# Altium PCB 400902.PcbDoc (part 1 of 2)
Units mm, origin at the board's own origin, x right, y up, seen from the top; angles counter-clockwise.
Board outline 45.72 x 50.8 mm, 4 copper layers (Top Layer, Mid-Layer 1, Mid-Layer 2, Bottom Layer), stack 1.564 mm thick; 61 components, 50 nets, 204 pads, 509 vias.
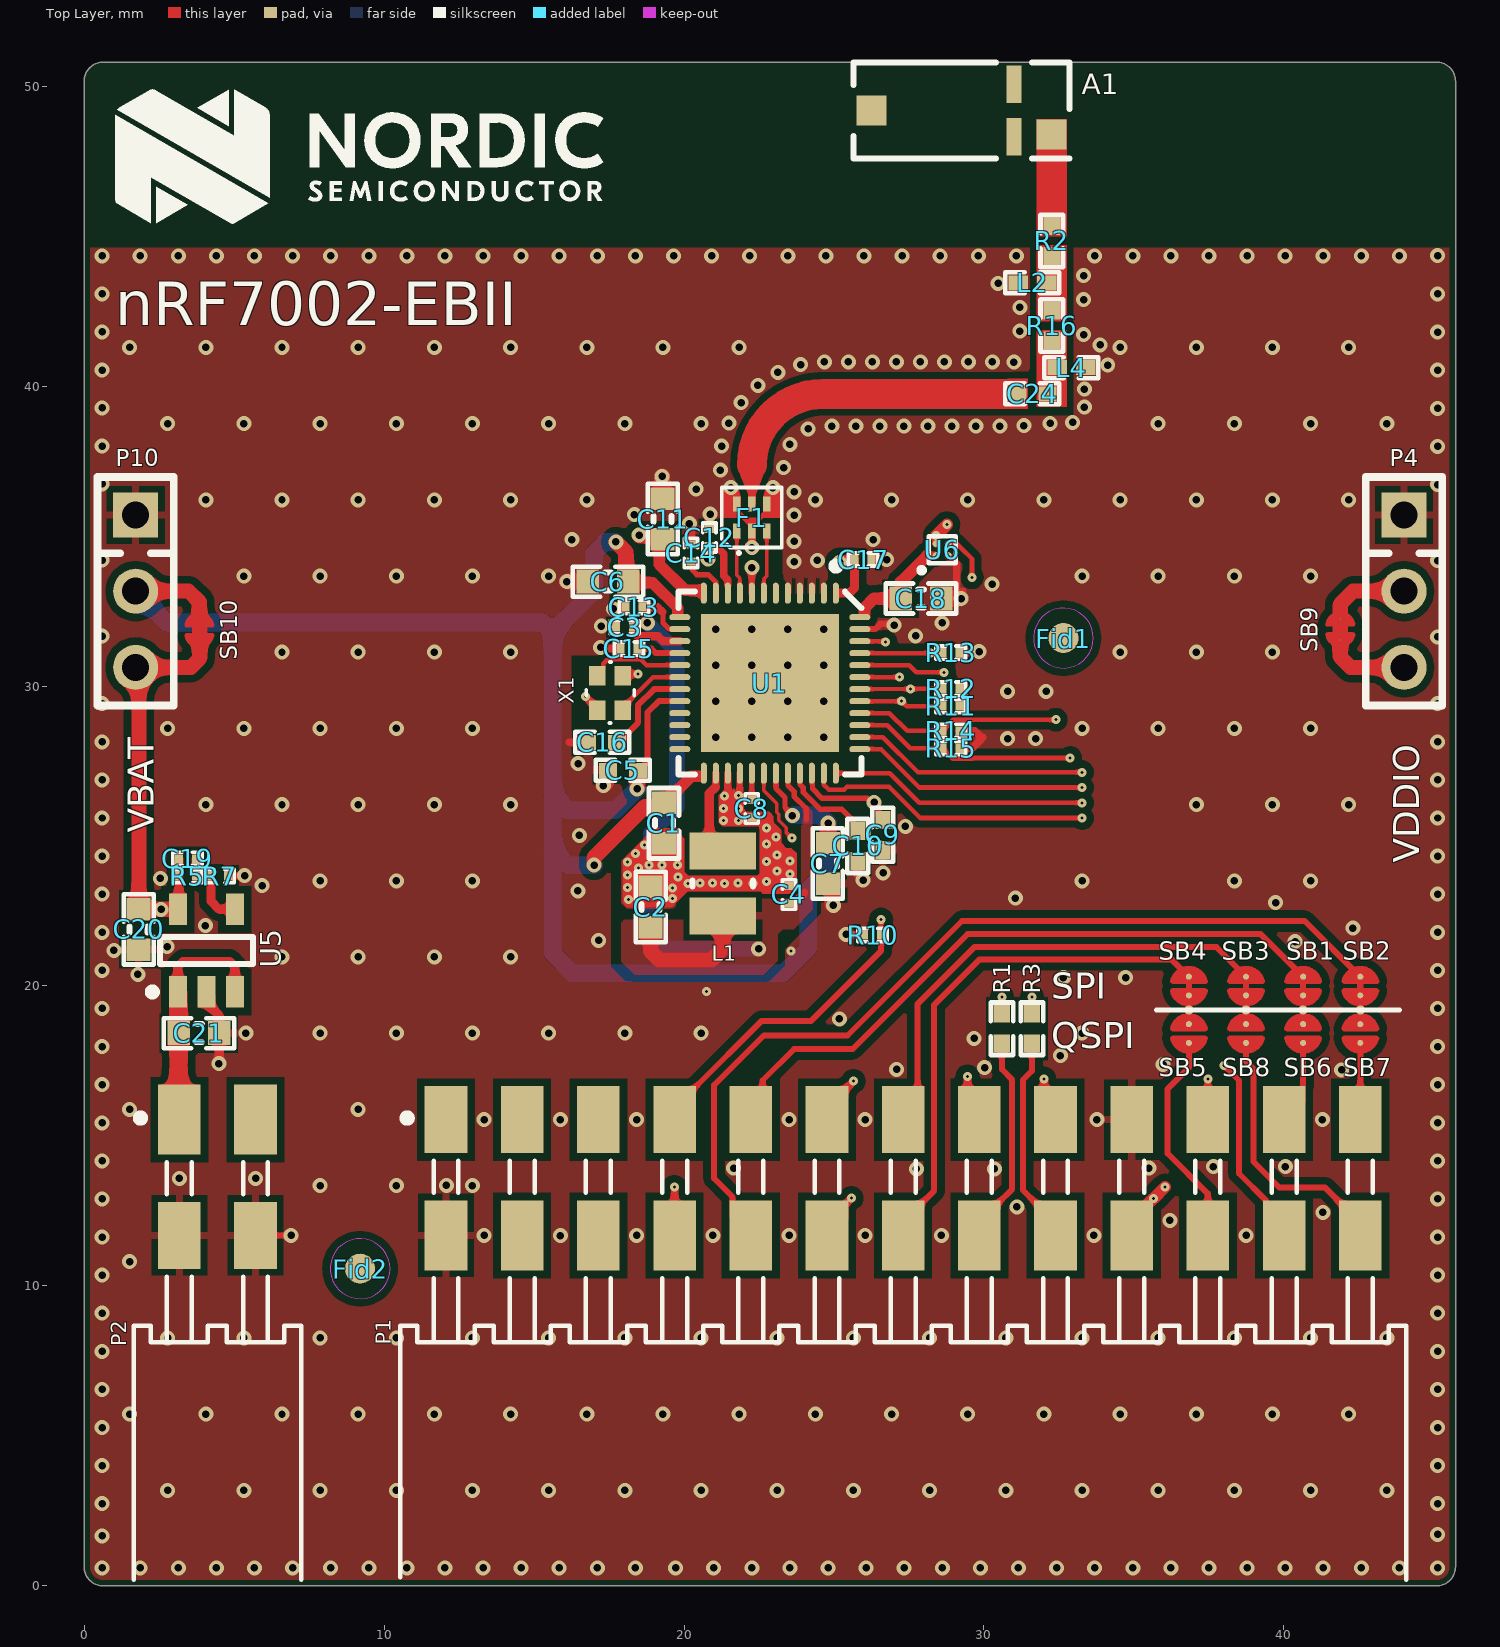
[diagram p0: Top Layer view]
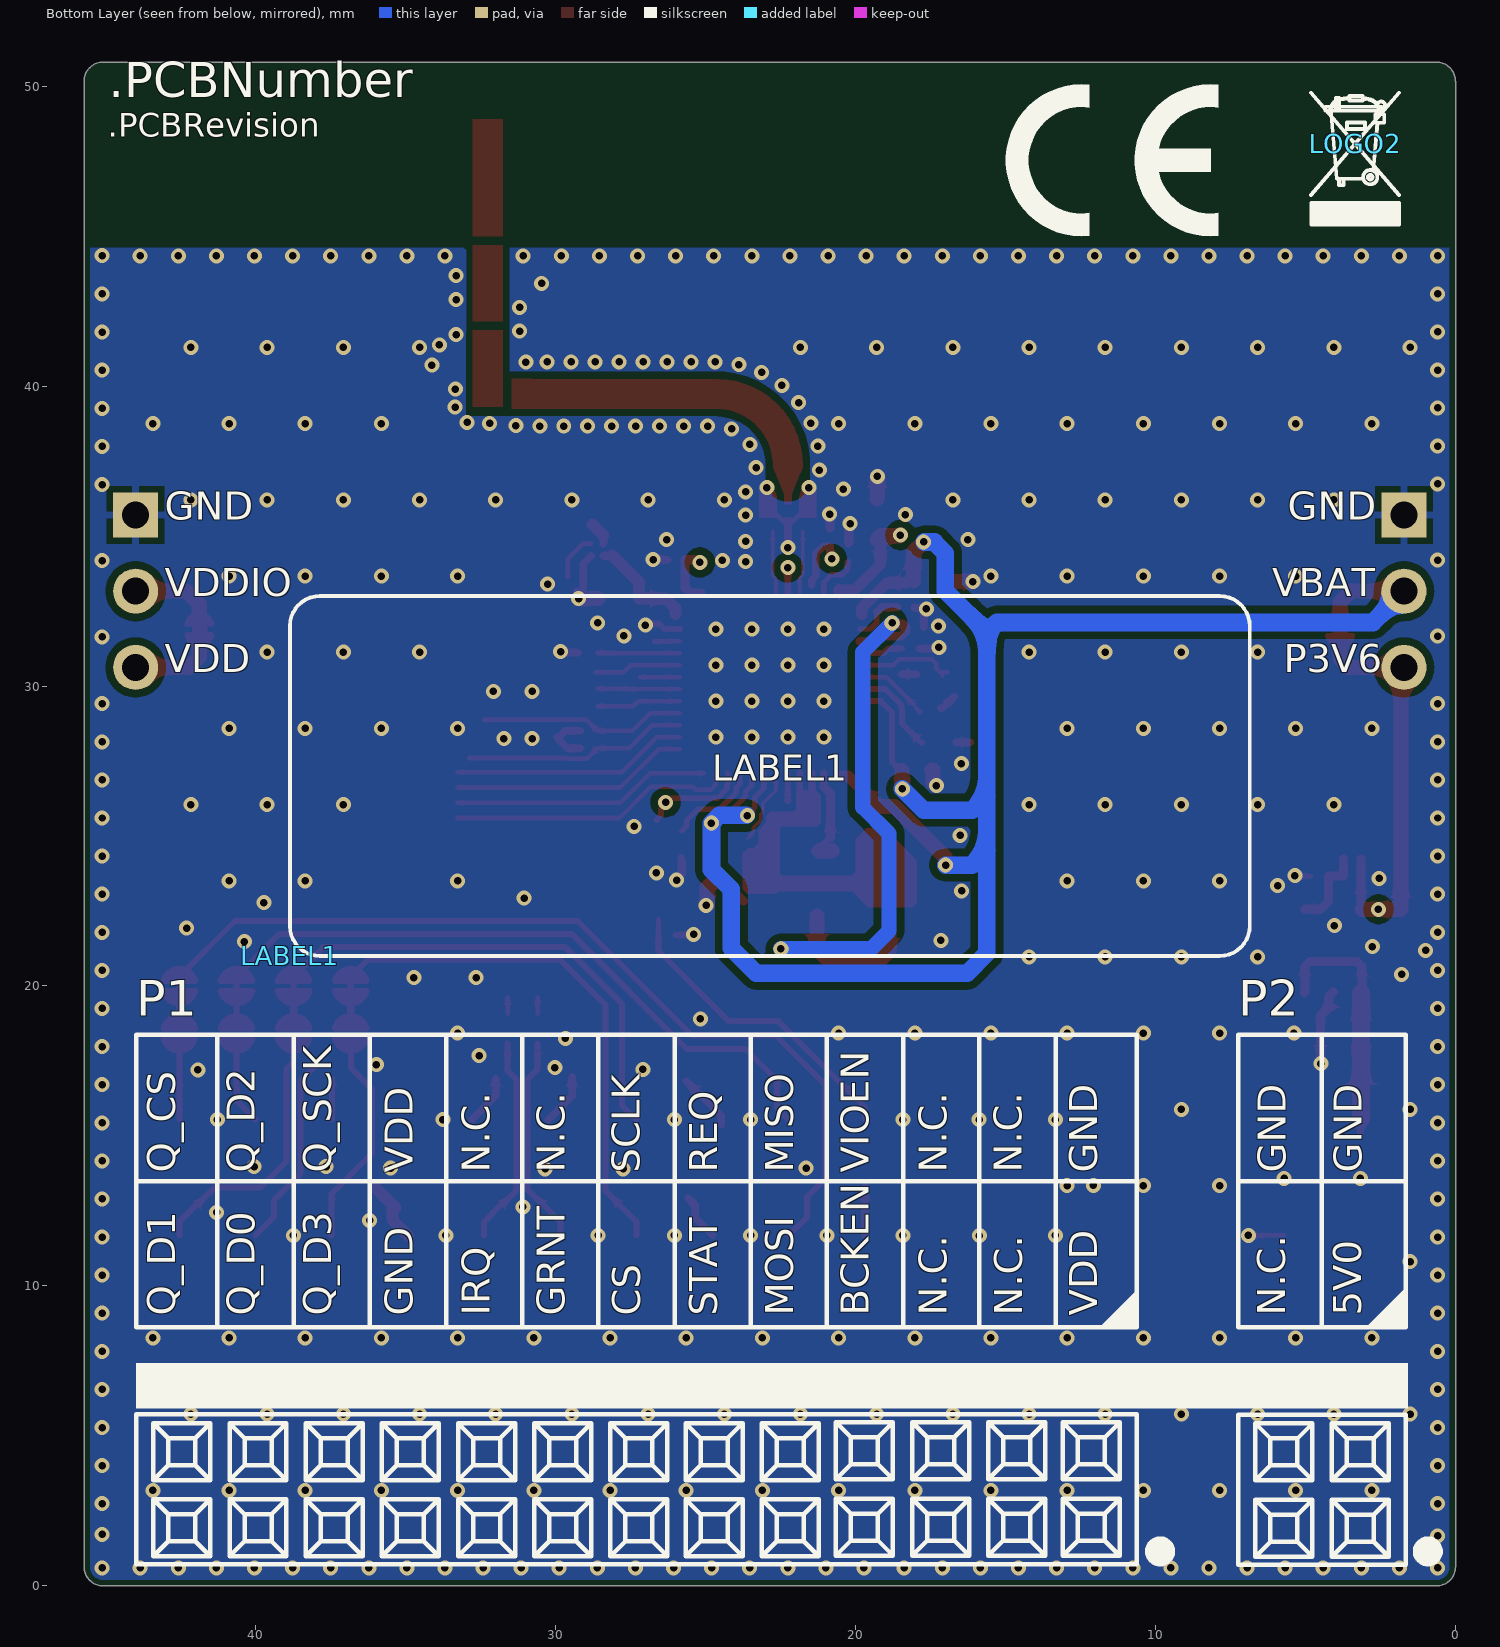
[diagram p1: Bottom Layer view, seen from below]
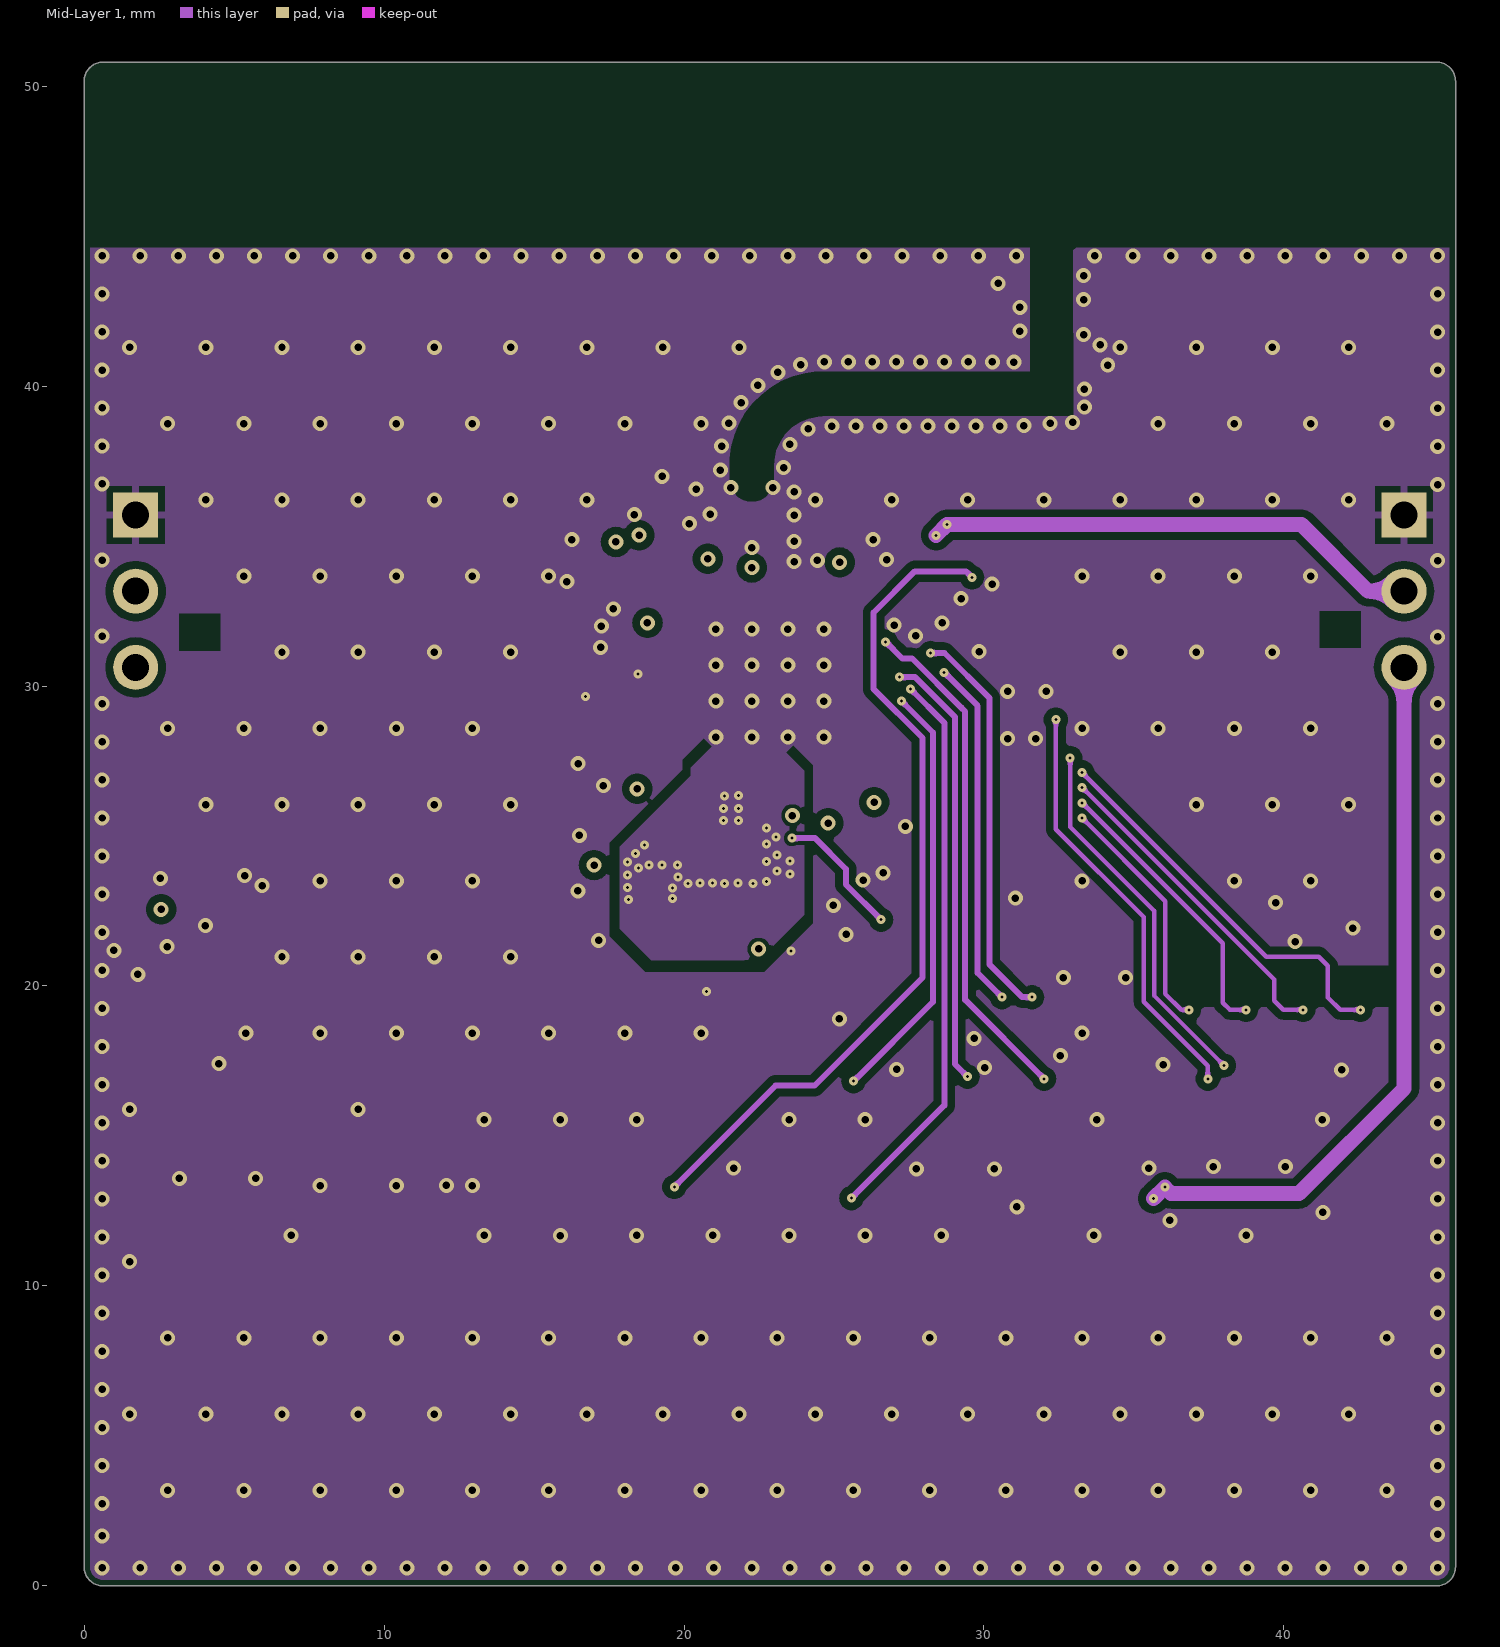
[diagram p2: Mid-Layer 1]
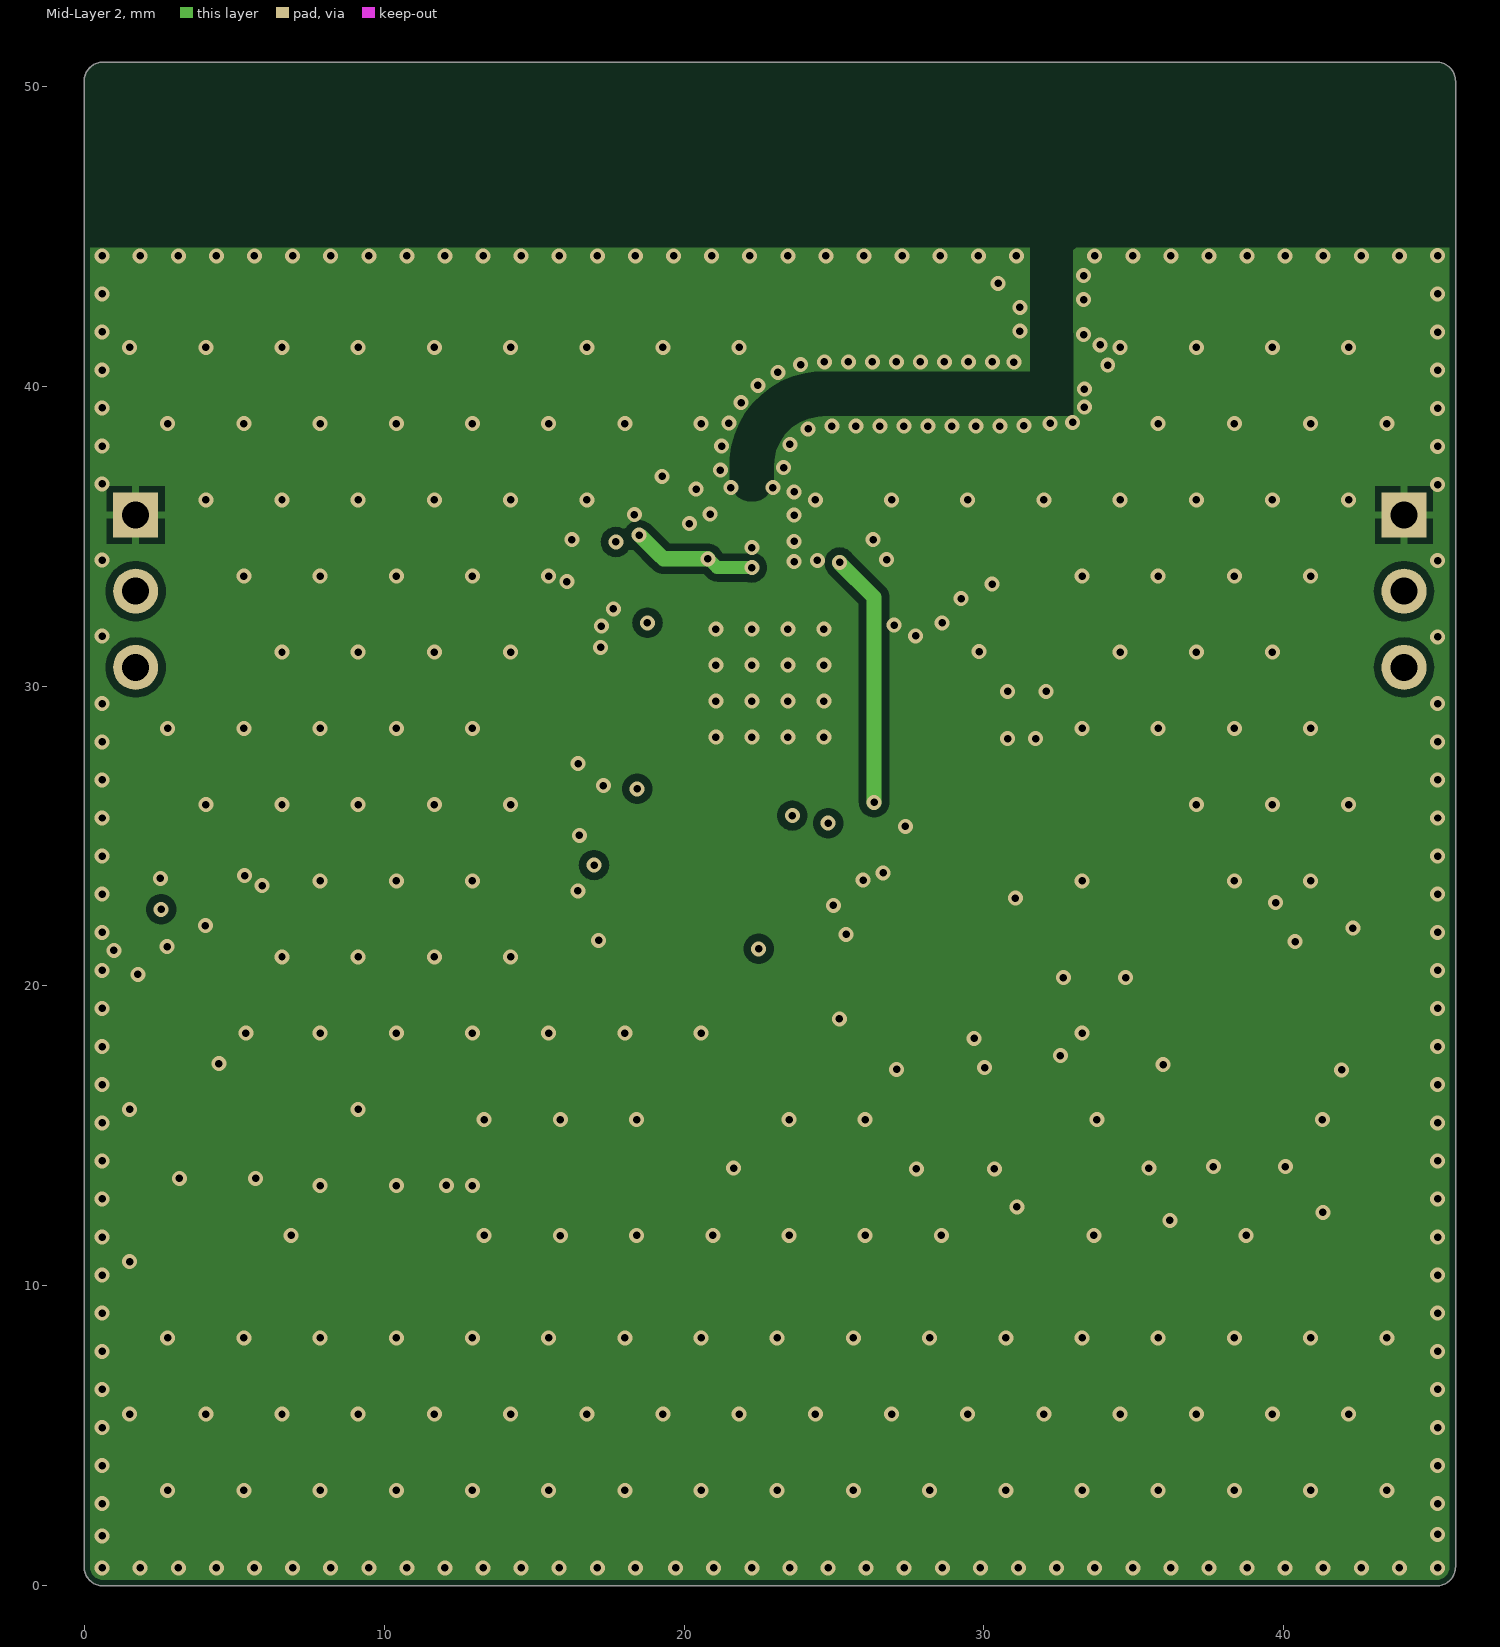
[diagram p3: Mid-Layer 2]
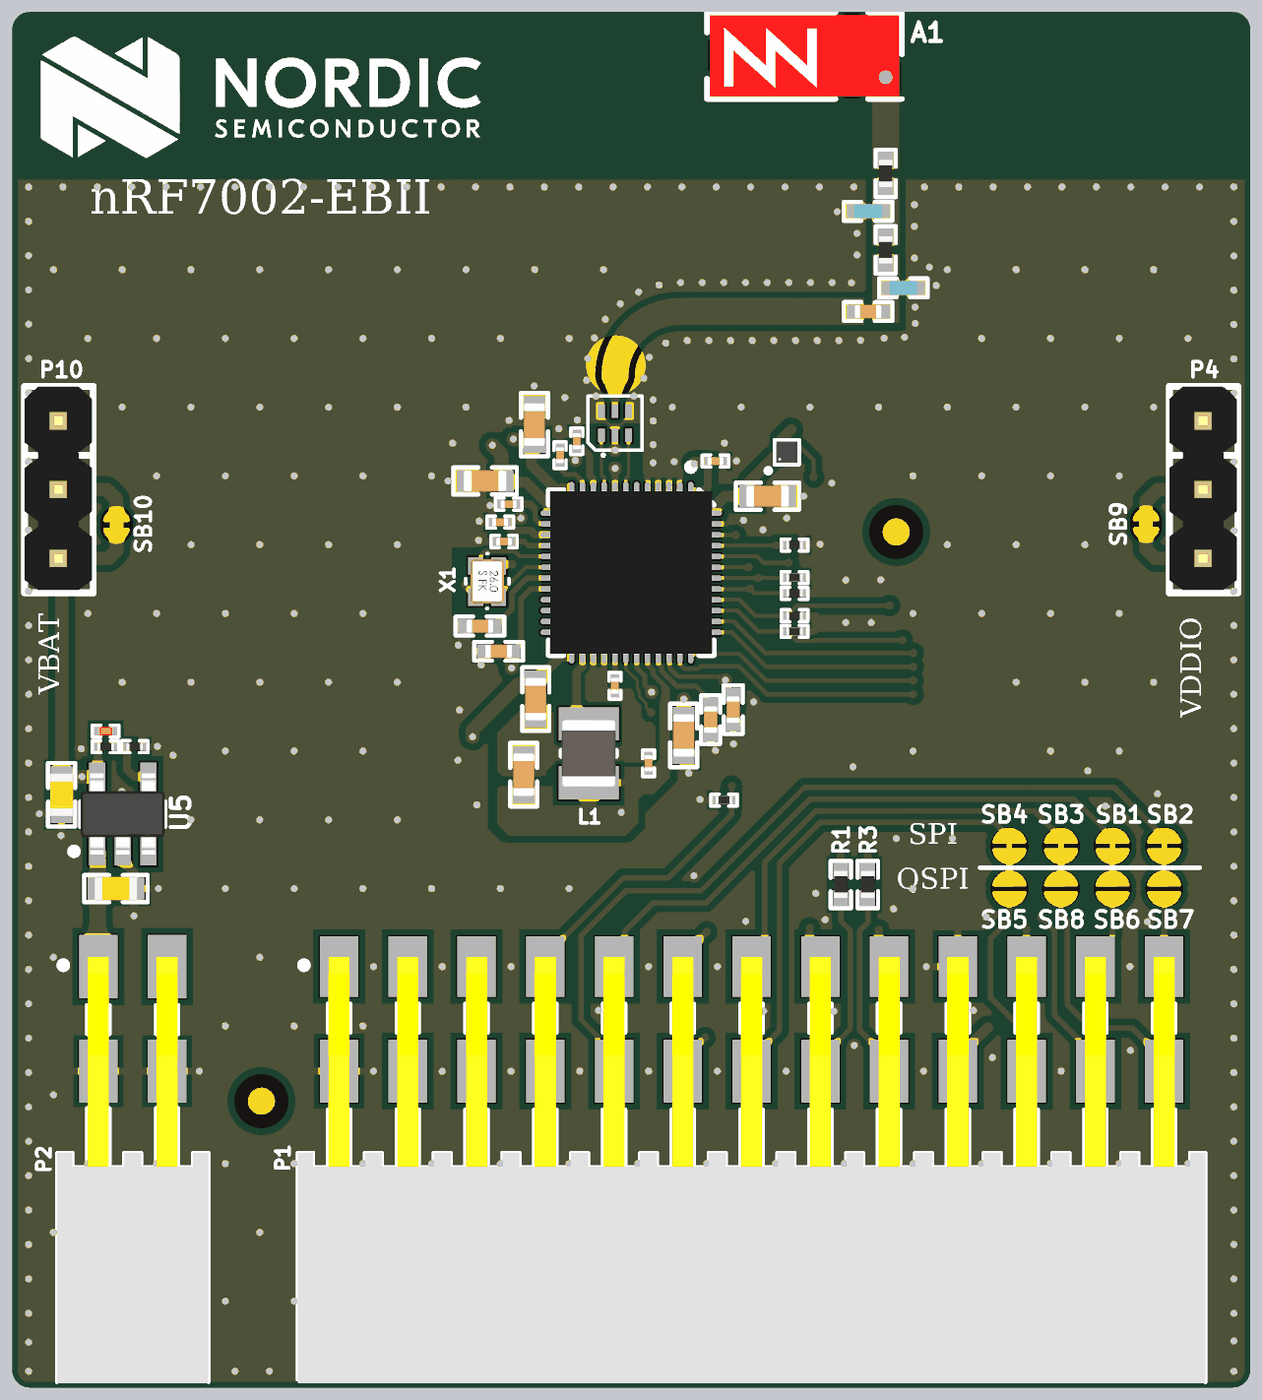
[diagram p5: 3D render of the assembled board from above, using the file's embedded part models]

## Layer stack, top to bottom
Top Solder: solder mask 0.0254, Solder Resist Blue, Dk 4
Top Layer: signal copper 0.0356
Dielectric1: prepreg 0.076, FR-4, Dk 4.4
Mid-Layer 1: signal copper 0.0356
Dielectric2: core 1.27, FR-4, Dk 4.4
Mid-Layer 2: signal copper 0.0356
Dielectric3: prepreg 0.076, FR-4, Dk 4.4
Bottom Layer: signal copper 0.0356
Bottom Solder: solder mask 0.0254, Solder Resist Blue, Dk 4

## Board outline
0,0.635 ccw(c0.635,0.635) 0.635,0 45.085,0 ccw(c45.085,0.635) 45.72,0.635 45.72,50.164 ccw(c45.085,50.164) 45.085,50.799 45.085,50.8 0.636,50.8 0.636,50.799 ccw(c0.636,50.164) 0.001,50.164 0,50.164

## Design rules (kind name [scope] priority, off if disabled: settings)
BoardOutlineClearance [Not (InComponent('A1') or InComponent('P1')or InComponent('P2') or HasPad('Free-666'))] p1: gap=0.2 ignorepadtopadclearanceinfootprint=FALSE
Clearance RF_Clerance [InNetClass('RF') vs InPoly] p1: gap=0.23 ignorepadtopadclearanceinfootprint=FALSE
Clearance Polygon_Clearance [(InNamedPolygon('Top_Layer-GND')) or (InNamedPolygon('Bottom_Layer-GND')) or (InNamedPolygon('Mid_Layer_1-GND')) or (InNamedPolygon('Mid_Layer_2-GND'))] p2: gap=0.25 ignorepadtopadclearanceinfootprint=FALSE
Clearance U1_Clearance [TouchesRoom('nRF7002_room') vs OnTopLayer] p3: gap=0.12 ignorepadtopadclearanceinfootprint=FALSE
Clearance [All] p4: gap=0.125 ignorepadtopadclearanceinfootprint=FALSE
DiffPairsRouting [All] p1: maxlimit=0.254 minlimit=0.15 mostfreqgap=0.254 toplayer_maxgap=0.15 toplayer_prefgap=0.15 toplayer_minwidth=0.203 toplayer_maxwidth=0.381 toplayer_prefwidth=0.381 midlayer1_mingap=0.254 midlayer1_minwidth=0.203 midlayer1_maxwidth=0.381 midlayer1_prefwidth=0.381 midlayer2_mingap=0.254 midlayer2_minwidth=0.203 midlayer2_maxwidth=0.381 midlayer2_prefwidth=0.381 bottomlayer_maxgap=0.15 bottomlayer_prefgap=0.15 bottomlayer_minwidth=0.203 bottomlayer_maxwidth=0.381 bottomlayer_prefwidth=0.381 maxuncoupledlength=12.7
FabricationTestPointUsage TestPointUsage [All] p1: valid=0 allowmultiple=FALSE
FabricationTestpoint Testpoint [All] p1: side=3 testpointundercomponent=TRUE minsize=1.016 maxsize=2.54 preferedsize=1.524 minholesize=0 maxholesize=1.016 preferedholesize=0.813 testpointgrid=0.025 allowsidetop=TRUE allowsidebottom=TRUE usegrid=TRUE gridtolerance=0
Height [All] p1 off: minheight=0 maxheight=25.4 prefheight=12.7
HoleSize [All] p1: absolutevalues=TRUE maxlimit=5 minlimit=0.1 maxpercent=80.000 minpercent=20.000
HoleToHoleClearance [All] p1: gap=0.25 allowstackedmicrovias=FALSE
MinimumAnnularRing [All] p1: minimumring=0.1
MinimumSolderMaskSliver [Not InComponent('U1')] p1: minsoldermaskwidth=0.075
PolygonConnect PolygonConnect_Via [isVia and innet(gnd)] p1: connectstyle=Direct reliefconductorwidth=0.254 reliefentries=4 polygonreliefangle="90 Angle" airgapwidth=0.254
PolygonConnect PolygonConnect_footprint [HasFootprint('INDC1005X04L_C2') or  HasFootprint('CAPC1005X04L_C2') or  HasFootprint('RESC1005X04L_C2') or   HasFootprint('CAPC1608X06L') or  HasFootprint('CAPC2012X11L') or  HasFootprint('SOT95P280X140-5N')] p2: connectstyle=Direct reliefconductorwidth=0.254 reliefentries=4 polygonreliefangle="90 Angle" airgapwidth=0.254
PolygonConnect [All] p3: connectstyle=Relief reliefconductorwidth=0.254 reliefentries=4 polygonreliefangle="90 Angle" airgapwidth=0.213
RoomDefinition nRF7002_room [False vs False] p1: confinementstyle=ConfineIn formatcopy=TRUE lockcomponents=FALSE outline 15.374,37.727 29.243,37.727 29.243,25.1 15.374,25.1
RoutingVias [All] p1: holewidth=0.25 width=0.5 viastyle="Through Hole" minholewidth=0.1 minwidth=0.5 maxholewidth=0.711 maxwidth=1.27
SilkToSolderMaskClearance SilkscreenOverComponentPads [IsPad vs Not (HasFootprint('CAPC1608X06L') or HasFootprint('CAPC0603X03L_C') or HasFootprint('CAPC1005X04L') or HasFootprint('INDC1005X04L') or HasFootprint('RESC0603X03L_C') or HasFootprint('LED_0603_G') or HasFootprint('BGA4C40P2X2_76X76X62') or  HasFootprint('RESC1005X04L') or HasFootprint('INDC1005X04L_WW'))] p1: minsilkscreentomaskgap=0.1 clearancetoexposedcopper=TRUE
SolderMaskExpansion SolderMaskExpansion_via [IsVia] p1: expansion=0.076 istentingtop=TRUE
SolderMaskExpansion SolderMaskExpansion_1 [All] p2: expansion=0.076 istentingtop=FALSE
Width U1_Width [All] p1: maxlimit=2.54 minlimit=0.11 preferedwidth=0.15
Width [All] p2: maxlimit=2.54 minlimit=0.15 preferedwidth=0.15
22 further rules are at their usual default settings.

## Classes and differential pairs
net class RF: ANT ANTWIFI NetC24_1 NetL2_2 TXRF0 TXRF1

## Components (designator, comment, footprint, x,y, rotation, side; value= is the part's Value field where it differs from the comment)
A1 "NN03-320" NN03-320 29.257,49.19 r0 top locked
C1 "4.7µF" CAPC1608X06L 19.332,25.426 r90 top
C2 "4.7µF" CAPC1608X06L 18.887,22.632 r270 top
C3 "0.22µF" CAPC0603X03L_C 18.018,31.959 r0 top
C4 "0.47µF" CAPC0603X03L_C 23.499,23.052 r270 top
C5 "1.0µF" CAPC1005X04L 17.962,27.191 r0 top
C6 "4.7µF" CAPC1608X06L 17.461,33.481 r0 top
C7 "2.2µF" CAPC1608X06L 24.796,24.083 r270 top
C8 "10nF" CAPC0603X03L_C 22.258,25.916 r270 top
C9 "2.2µF" CAPC1005X04L 26.63,25.037 r90 top
C10 "1.0µF" CAPC1005X04L 25.794,24.667 r270 top
C11 "4.7µF" CAPC1608X06L 19.285,35.563 r270 top
C12 "100nF" CAPC0603X03L_C 20.848,34.947 r90 top
C13 "22nF" CAPC0603X03L_C 18.331,32.626 r0 top
C14 "0.47µF" CAPC0603X03L_C 20.232,34.432 r270 top
C15 "2.2µF" CAPC0603X03L_C 18.162,31.245 r0 top
C16 "1.0µF" CAPC1005X04L 17.27,28.121 r0 top
C17 "100nF" CAPC0603X03L_C 25.971,34.217 r180 top
C18 "2.2µF" CAPC1608X06L 27.898,32.917 r180 top
C19 "82pF" CAPC0603X03L_C 3.443,24.24 r0 top locked
C20 "4.7µF" CAPC1608X06L 1.818,21.89 r90 top locked
C21 "4.7µF" CAPC1608X06L 3.825,18.425 r180 top locked
C24 "0.7pF" CAPC1005X04L 31.61,39.738 r180 top
F1 "LFD_Diplexer" CAF-50P160X80-6N 22.26,35.615 r90 top value=LFD182G45DCJD247
Fid1 "Fiducial mark" Fiducial 32.647,31.597 r0 top value=N.A.
Fid2 "Fiducial mark" Fiducial 9.2,10.575 r0 top value=N.A.
L1 "3.3µH" INDC2520X10N 21.289,23.421 r270 top
L2 "7.0nH" INDC1005X04L_WW 31.61,43.441 r0 top locked
L4 "2.4nH" INDC1005X04L_WW 32.91,40.612 r180 top
LABEL1 "12x32mm" LabelSilk_12x32 38.86,21 r180 bottom
LOGO2 "WEE Symbol" WEEE_3x4.5mm 3.35,48.075 r180 bottom
P1 "Socket 2x13, Angled" SOCKET_ANG_2x13_SMD-2.54mm-Mirrored 27.305,13.614 r0 top locked
P2 "Socket 2x2, Angled" SOCKET_ANG_2x2_SMD-2.54mm-Mirrored 4.445,13.614 r0 top locked
P4 "Pin List 1x3" LIST_1x3 44.003,33.16 r270 top
P10 "Pin List 1x3" LIST_1x3 1.718,33.16 r270 top
R1 "0R" RESC1005X04L 30.6,18.575 r90 top
R2 "0R" RESC1005X04L 32.26,44.84 r270 top locked
R3 "0R" RESC1005X04L 31.6,18.575 r90 top
R5 "560k" RESC0603X03L_C 3.443,23.665 r180 top locked
R7 "160k" RESC0603X03L_C 4.518,23.665 r180 top locked
R10 "100k" RESC0603X03L_C 26.286,21.694 r180 top
R11 "100k" RESC0603X03L_C 28.894,29.332 r0 top
R12 "100k" RESC0603X03L_C 28.894,29.91 r0 top
R13 "100k" RESC0603X03L_C 28.894,31.114 r180 top
R14 "100k" RESC0603X03L_C 28.894,28.503 r0 top
R15 "100k" RESC0603X03L_C 28.894,27.925 r0 top
R16 "0R" RESC1005X04L 32.26,42.015 r270 top locked
SB1 "Solderbridge" Solderbridge_SHORTED_0.4 40.64,19.997 r90 top locked net-tie
SB2 "Solderbridge" Solderbridge_SHORTED_0.4 42.545,19.997 r90 top locked net-tie
SB3 "Solderbridge" Solderbridge_SHORTED_0.4 38.735,19.997 r90 top locked net-tie
SB4 "Solderbridge" Solderbridge_SHORTED_0.4 36.83,19.997 r90 top locked net-tie
SB5 "Solderbridge" Solderbridge_0.4#1 36.83,18.415 r270 top locked
SB6 "Solderbridge" Solderbridge_0.4#1 40.64,18.415 r270 top locked
SB7 "Solderbridge" Solderbridge_0.4#1 42.545,18.415 r270 top locked
SB8 "Solderbridge" Solderbridge_0.4#2 38.735,18.415 r270 top locked
SB9 "Solderbridge" Solderbridge_Shorted_Power 41.872,31.883 r270 top net-tie
SB10 "Solderbridge" Solderbridge_Shorted_Power 3.85,31.86 r90 top net-tie
U1 "nRF7002-QFAA" QFN40P600X600X60-48N 22.86,30.095 r270 top
U5 "AP2127" SOT95P282X145-5N 4.075,21.175 r90 top locked
U6 "TCK106AG" BGA4C40P2X2_76X76X62 28.608,34.544 r90 top
X1 "40MHz" BT-XTAL_1612 17.539,29.771 r270 top locked

## Footprints (in the part's own frame and the unit in brackets; to place one, negate y for a bottom-side part, rotate by r counter-clockwise, add the part's x,y. Pads: shape width x height; smd on the part's side, far side on the other; paste and mask are expansions set on the pad)
BGA4C40P2X2_76X76X62 [mm] "BGA, 4-Leads, Body 0.8x0.8mm,  Pitch 0.40mm"
  round 0.235 smd mask+0.04: A1(-0.2,0.2) A2(0.2,0.2) B1(-0.2,-0.2) B2(0.2,-0.2)
  silkscreen extent -0.74,-0.45 0.45,0.74, body extent -0.39,-0.39 0.4,0.4, height 0.55
BT-XTAL_1612 [mm] "Crystal 1.6 x 1.2 mm"
  rect 0.65x0.55 smd: 1(-0.575,-0.425) 2(0.575,-0.425) 3(0.575,0.425) 4(-0.575,0.425)
  silkscreen extent -1.03,-0.8 1,0.8, body extent -0.83,-0.63 0.83,0.63, height 0.41
CAF-50P160X80-6N [mm] "Chip Array, Flat, 6-Leads, Pitch 0,50mm,  Body 1,60x0,80mm,  IPC Medium Density"
  rect 0.5x0.25 smd mask+0.08: 1(-0.45,0.5) 2(-0.45,0) 3(-0.45,-0.5) 5(0.45,-0.5) 6(0.45,0) 7(0.45,0.5)
  Top Layer region: 0.7,0.375 0.2,0.375 0,0.175 0,-0.175 0.2,-0.375 0.7,-0.375 0.966,-0.462 1,-0.95 0,-0.95 0,-0.375 -0.25,-0.125 -0.8,-0.125 -0.9,-0.225 -1,-0.225 -1,0.225 -0.9,0.225 -0.8,0.125 -0.25,0.125 0,0.375 0,0.95 1,0.95 0.966,0.457
  silkscreen extent -1.23,-1 1,1, body extent -0.5,-0.88 0.5,0.88, height 0.67
CAPC0603X03L_C [mm] "Chip Capacitor, 2-Leads, Body 0.6x0.3mm, IPC High Density"
  rect 0.27x0.3 smd mask+0.05: 1(-0.285,0) 2(0.285,0)
  silkscreen extent -0.49,-0.22 0.49,0.22, body extent -0.3,-0.15 0.3,0.15, height 0.3
CAPC1005X04L [mm] "Chip Capacitor, 2-Leads, Body 1.0x0.5mm, IPC High Density"
  rect 0.6x0.5 smd: 1(-0.5,0) 2(0.5,0)
  silkscreen extent -0.9,-0.35 0.9,0.35, body extent -0.5,-0.25 0.5,0.25, height 0.5
CAPC1608X06L [mm] "Chip Capacitor, 2-Leads, Body 1.6x0.8mm, IPC High Density"
  rect 0.75x0.8 smd: 1(-0.675,0) 2(0.675,0)
  silkscreen extent -1.17,-0.5 1.17,0.5, body extent -0.8,-0.4 0.8,0.4, height 0.8
Fiducial [mm] "Fiducial Mark"
  round 1 smd paste-2539.97 mask+0.5: 0(0,0)
  Top Layer keep-out circle w0.01: c0,0 r1
INDC1005X04L_WW [mm] "Chip Inductor, 2-Leads, Body 1.0x0.5mm, IPC High Density"
  rect 0.65x0.5 smd: 1(-0.475,0) 2(0.475,0)
  silkscreen extent -0.9,-0.35 0.9,0.35, body extent -0.5,-0.3 0.5,0.3, height 0.51
INDC2520X10N [mm] "Chip Inductor, 2-Leads, Body 2,50x2,00mm, IPC Medium Density"
  rect 1.23x2.22 smd: 1(-1.085,0) 2(1.085,0)
  silkscreen extent -0.1,-1.01 0.1,1.01, body extent -1.25,-1 1.25,1, height 1.2
LabelSilk_12x32 [mm] "PCA version label, stick-on, 12x32mm"
  silkscreen extent 0,0 32,12, body extent 0,0 32,12, height 0.05
LIST_1x3 [mm] "Pin List, 2.54mm through hole"
  rect 1.5x1.5 hole 0.9: 1(-2.54,0)
  round 1.5 hole 0.9: 2(0,0) 3(2.54,0)
  silkscreen extent -3.81,-1.27 3.81,1.27, body extent -3.81,-1.27 3.71,1.23, height 8.2
NN03-320 [mm]
  rect 1x1 smd: 1(-3,0) 4(3,-0.8)
  rect 0.5x1.25 smd: 2(1.75,-0.875) 3(1.75,0.875)
  Multi-Layer pour cut-out: -3.5,1.5 3.5,1.5 3.5,-1.5 -3.5,-1.5
  silkscreen extent -3.6,-1.6 3.6,1.6, body extent -3.5,-1.5 3.5,1.5, height 2.01
QFN40P600X600X60-48N [mm] "QFN, 48-Leads, Body 6.1x6.1mm (max), Pitch 0.40mm, IPC Medium Density"
  oval 0.7x0.2 smd: 1(-3,2.2) 2(-3,1.8) 3(-3,1.4) 4(-3,1) 5(-3,0.6) 6(-3,0.2) 7(-3,-0.2) 8(-3,-0.6) 9(-3,-1) 10(-3,-1.4) 11(-3,-1.8) 12(-3,-2.2) 25(3,-2.2) 26(3,-1.8) 27(3,-1.4) 28(3,-1) 29(3,-0.6) 30(3,-0.2) 31(3,0.2) 32(3,0.6) 33(3,1) 34(3,1.4) 35(3,1.8) 36(3,2.2)
  oval 0.2x0.7 smd: 13(-2.2,-3) 14(-1.8,-3) 15(-1.4,-3) 16(-1,-3) 17(-0.6,-3) 18(-0.2,-3) 19(0.2,-3) 20(0.6,-3) 21(1,-3) 22(1.4,-3) 23(1.8,-3) 24(2.2,-3) 37(2.2,3) 38(1.8,3) 39(1.4,3) 40(1,3) 41(0.6,3) 42(0.2,3) 43(-0.2,3) 44(-0.6,3) 45(-1,3) 46(-1.4,3) 47(-1.8,3) 48(-2.2,3)
  rect 4.6x4.6 smd: 49(0,0)
  silkscreen extent -4.02,-3.05 3.05,3.05, body extent -3.02,-3.02 3.02,3.02, height 0.86
RESC0603X03L_C [mm] "Chip Resistor, 2-Leads, Body 0.6x0.3mm, IPC High Density"
  rect 0.27x0.3 smd: 1(-0.285,0) 2(0.285,0)
  silkscreen extent -0.49,-0.22 0.49,0.22, body extent -0.3,-0.15 0.3,0.15, height 0.23
RESC1005X04L [mm] "Chip Resistor, 2-Leads, Body 1.0x0.5mm, IPC High Density"
  rect 0.6x0.55 smd mask+0.05: 1(-0.5,0) 2(0.5,0)
  silkscreen extent -0.88,-0.38 0.88,0.38, body extent -0.5,-0.25 0.5,0.25, height 0.3
SOCKET_ANG_2x2_SMD-2.54mm-Mirrored [mm]
  rect 1.42x2.34 smd mask+0.05: 1(-1.27,1.93) 3(1.27,1.93)
  rect 1.42x2.24 smd mask+0.05: 2(-1.27,-1.931) 4(1.27,-1.93)
  silkscreen extent -2.8,-13.41 2.8,2.11, body extent -2.79,-13.46 2.79,2.29, height 4.96
SOCKET_ANG_2x13_SMD-2.54mm-Mirrored [mm] "2.54mm pitch, Female, Socket, 2-rows, 26 positions. / Mirrored pin 1 numbering."
  rect 1.42x2.24 smd mask+0.05: 1(-15.24,1.93) 3(-12.7,1.93) 5(-10.16,1.93) 7(-7.62,1.93) 9(-5.08,1.93) 11(-2.54,1.93) 13(0,1.93) 15(2.54,1.93) 17(5.08,1.93) 19(7.62,1.93) 21(10.16,1.931) 23(12.7,1.931) 25(15.24,1.93)
  rect 1.42x2.34 smd mask+0.05: 2(-15.24,-1.93) 4(-12.7,-1.93) 6(-10.16,-1.93) 8(-7.62,-1.93) 10(-5.08,-1.93) 12(-2.54,-1.93) 14(0,-1.93) 16(2.54,-1.93) 18(5.08,-1.93) 20(7.62,-1.93) 22(10.16,-1.93) 24(12.7,-1.93) 26(15.24,-1.93)
  silkscreen extent -16.76,-13.41 16.76,2.11, body extent -16.76,-13.46 16.76,2.29, height 5.02
Solderbridge_0.4#1 [mm]
  round 0.2 smd paste-10: 1(-0.312,0) 2(0.312,0)
  Top Layer region: -0.077,-0.553 -0.129,-0.605 -0.205,-0.554 -0.409,-0.351 -0.462,-0.292 -0.521,-0.193 -0.549,-0.099 -0.544,0.122 -0.518,0.193 -0.434,0.33 -0.351,0.411 -0.259,0.469 -0.159,0.556 -0.08,0.565
  Top Layer region: 0.077,0.553 0.203,0.512 0.335,0.424 0.409,0.351 0.462,0.292 0.521,0.193 0.549,0.099 0.544,-0.122 0.518,-0.193 0.434,-0.33 0.351,-0.411 0.152,-0.536 0.077,-0.559
  Top Layer lines w0.152: -0.153,-0.558 cw(c-0.035,0) -0.605,0 cw(c-0.035,0) -0.156,0.557 ; 0.153,-0.557 ccw(c0.03,0) 0.153,0.557
Solderbridge_0.4#2 [mm]
  round 0.2 smd paste-10: 1(-0.312,0) 2(0.312,0)
  Top Layer region: -0.077,-0.553 -0.129,-0.605 -0.205,-0.554 -0.409,-0.351 -0.462,-0.292 -0.521,-0.193 -0.549,-0.099 -0.544,0.122 -0.518,0.193 -0.434,0.33 -0.351,0.411 -0.259,0.469 -0.159,0.556 -0.08,0.565
  Top Layer region: 0.077,0.553 0.203,0.512 0.335,0.424 0.409,0.351 0.462,0.292 0.521,0.193 0.549,0.099 0.544,-0.122 0.518,-0.193 0.434,-0.33 0.351,-0.411 0.152,-0.536 0.077,-0.559
  Top Layer lines w0.152: -0.153,-0.558 cw(c-0.035,0) -0.605,0 cw(c-0.035,0) -0.156,0.557 ; 0.153,-0.557 ccw(c0.03,0) 0.6,0 ccw(c0.03,0) 0.153,0.557
Solderbridge_SHORTED_0.4 [mm]
  round 0.2 smd paste-10: 1(-0.312,0) 2(0.312,0)
  Top Layer region: 0.077,0.553 0.203,0.512 0.335,0.424 0.409,0.351 0.462,0.292 0.521,0.193 0.549,0.099 0.544,-0.122 0.518,-0.193 0.434,-0.33 0.351,-0.411 0.152,-0.536 0.077,-0.559
  Top Layer region: -0.077,-0.553 -0.129,-0.605 -0.205,-0.554 -0.409,-0.351 -0.462,-0.292 -0.521,-0.193 -0.549,-0.099 -0.544,0.122 -0.518,0.193 -0.434,0.33 -0.351,0.411 -0.259,0.469 -0.159,0.556 -0.08,0.565
  Top Layer lines w0.152: -0.156,0.557 ccw(c-0.035,0) -0.153,-0.558 ; 0.153,0.557 cw(c0.03,0) 0.153,-0.557
  Top Layer lines w0.203: -0.312,0 0.363,0
Solderbridge_Shorted_Power [mil]
  round 1 smd paste-99999: 1(-13.84,0.21) 2(13.72,0.21)
  Top Layer region: -4.92,9.84 4.92,9.84 4.92,-9.84 -4.92,-9.84
  Top Layer region: 7.43,-19.16 15.71,-15.53 21.49,-8.59 23.56,0.21 23.56,0.21 21.49,9 15.71,15.94 7.43,19.57 7.43,19.57 6.12,19.52 4.96,18.92 4.16,17.89 3.88,16.61 3.88,16.61 3.88,-16.2 4.16,-17.47 4.96,-18.51 6.12,-19.11 7.43,-19.16
  Top Layer region: -7.54,19.57 -15.82,15.94 -21.61,9 -23.68,0.21 -23.68,0.21 -21.61,-8.59 -15.82,-15.53 -7.54,-19.16 -7.54,-19.16 -6.24,-19.11 -5.08,-18.51 -4.28,-17.47 -3.99,-16.2 -3.99,-16.2 -3.99,16.61 -4.28,17.89 -5.08,18.92 -6.24,19.52 -7.54,19.57
SOT95P282X145-5N [mm] "SOT23, 5-Leads, Body 2.96x2.82mm, Pitch 0.95mm, IPC Medium Density"
  rect 1.05x0.6 smd: 1(-1.375,0.95) 2(-1.375,0) 3(-1.375,-0.95) 4(1.375,-0.95) 5(1.375,0.95)
  silkscreen extent -1.5,-1.55 0.45,1.92, body extent -1.5,-1.55 1.5,1.55, height 1.45
WEEE_3x4.5mm [mm]
  silkscreen extent -1.47,-2.7 1.47,1.71

## Part data
A1: "Dual-Band GNSS and Wi-Fi/BluetoothAntenna", Manufacturer=Ignion, Part number IPS=N.A., Part number NEMS=100700066, Supplier Part Number 1=2115-NN03-320CT-ND, Artikkelnr Noca=N.A., Author=rubr, Component Class=Antennas, Component Status=Active, ComponentLink1Description=Datasheet, ComponentLink1URL=https://ignion.io/files/DS_NN03-320.pdf, ComponentLink2Description="Supplier link", ComponentLink2URL=https://ignion.io/product/duo-mxtend/, Footprint Doc=NN03-320, HelpURL=https://ignion.io/files/UM_NN03-320.pdf, LatestRevisionDate=2021-12-10, Manufacturer Part Number=NN03-320, Note=N.A., Pad Count=4, Part Number=NN03-320, Part number Norautron=N.A., PartId=100700066, Published=2023-01-31, Supplier 1=DigiKey, Supplier 2=Mouser, Supplier Part Number 2=128-NN03-320
C1 C2 C6 C11: library part C0603-4µ7-25V-X6S-GRM188C81E475KE11, "Capacitor, Ceramic, 4.7µF 25V X6S 0603,±10%", Manufacturer=Murata, Manufacturer Part Number=GRM188C81E475KE11D, Part number IPS=N.A., Part number NEMS=100200486, Supplier Part Number 1=490-7199-1-ND, Artikkelnr Noca=N.A., Author=prbu, Component Class=Capacitors, Component Status=Active, ComponentLink1Description=Datasheet, ComponentLink1URL=https://www.murata.com/en-global/products/productdetail?partno=GRM188C81E475KE11%23, ComponentLink2Description="Supplier link", ComponentLink2URL=https://www.digikey.com/en/products/detail/murata-electronics/GRM188C81E475KE11D/3900424, Footprint Doc=0603, HelpURL=N.A., LatestRevisionDate=2021-12-09, Note=25V, Pad Count=2, Part Number=C0603-4µ7-25V-X6S-GRM188C81E475KE11, Part number Norautron=N.A., PartId=100200486, Published=2021-12-09, Supplier 1=DigiKey, Supplier 2=Mouser, Supplier Part Number 2=81-GRM188C81E475KE1D
C3: library part C0201-220n-10V-X5R-GRM033R61A224KE90, "Capacitor, Ceramic, 0.22µF 10V X5R 0201, ±10%", Manufacturer=Murata, Manufacturer Part Number=GRM033R61A224KE90D, Part number IPS=N.A., Part number NEMS=100200487, Supplier Part Number 1=81-GRM33R61A224KE90D, Artikkelnr Noca=N.A., Author=prbu, Component Class=Capacitors, Component Status=Active, ComponentLink1Description=Datasheet, ComponentLink1URL=https://www.murata.com/en-sg/products/productdetail?partno=GRM033R61A224KE90%23, ComponentLink2Description="Supplier link", ComponentLink2URL=https://www.mouser.com/ProductDetail/Murata-Electronics/GRM033R61A224KE90D?qs=sGAEpiMZZMtXHE36kCvv3zgoTDayw1zTTbet6g8ub%252Bg%3D, Footprint Doc=0201, HelpURL=N.A., LatestRevisionDate=2021-12-09, Note=10V, Pad Count=2, Part Number=C0201-220n-10V-X5R-GRM033R61A224KE90, Part number Norautron=N.A., PartId=100200487, Published=2021-12-09, Supplier 1=Mouser, Supplier 2=Mouser, Supplier Part Number 2=81-GRM033R61A224KE0J
C4 C14: library part C0201-470n-6.3V-X5R-GRM033R60J474KE90, "Capacitor, Ceramic, 0.47µF 6.3V X5R 0201,±10%", Manufacturer=Murata, Manufacturer Part Number=GRM033R60J474KE90D, Part number IPS=N.A., Part number NEMS=100200488, Supplier Part Number 1=490-10409-1-ND, Artikkelnr Noca=N.A., Author=prbu, Component Class=Capacitors, Component Status=Active, ComponentLink1Description=Datasheet, ComponentLink1URL=https://www.murata.com/en-sg/products/productdetail?partno=GRM033R60J474KE90%23, ComponentLink2Description="Supplier link", ComponentLink2URL=https://www.mouser.com/ProductDetail/Murata-Electronics/GRM033R60J474KE90D?qs=sGAEpiMZZMsKMBVpGK0sItoTn08PM719efpAd7qZWQ4%3D, Footprint Doc=0201, HelpURL=N.A., LatestRevisionDate=2021-12-09, Note=6.3V, Pad Count=2, Part Number=C0201-470n-6.3V-X5R-GRM033R60J474KE90, Part number Norautron=N.A., PartId=100200488, Published=2021-12-09, Supplier 1=DigiKey, Supplier 2=Mouser, Supplier Part Number 2=81-GRM33R60J474KE90D
C5: library part C0402-1µ0-35V-X5R-GRM155R6YA105KE11, "Capacitor, Ceramic, 1.0µF 35V X5R 0402,±10%", Manufacturer=Murata, Manufacturer Part Number=GRM155R6YA105KE11D, Part number IPS=N.A., Part number NEMS=100200489, Supplier Part Number 1=81-GRM155R6YA105KE1D, Artikkelnr Noca=N.A., Author=prbu, Component Class=Capacitors, Component Status=Active, ComponentLink1Description=Datasheet, ComponentLink1URL=https://www.murata.com/en-sg/products/productdetail?partno=GRM155R6YA105KE11%23, ComponentLink2Description="Supplier link", ComponentLink2URL=https://www.digikey.com/en/products/detail/murata-electronics/GRM155R6YA105KE11D/4905162, Footprint Doc=0402, HelpURL=N.A., LatestRevisionDate=2021-12-09, Note=35V, Pad Count=2, Part Number=C0402-1µ0-35V-X5R-GRM155R6YA105KE11, Part number Norautron=N.A., PartId=100200489, Published=2021-12-09, Supplier 1=Mouser, Supplier 2=DigiKey, Supplier Part Number 2=490-10019-1-ND
C7 C18: library part C0603-2µ2-16V-X7S-GRM188C71C225KE11, "Capacitor, Ceramic, 2.2µF 16V X7S 0603,±10%", Manufacturer=Murata, Manufacturer Part Number=GRM188C71C225KE11D, Part number IPS=N.A., Part number NEMS=100200490, Supplier Part Number 1=81-GRM188C71C225KE1D, Artikkelnr Noca=N.A., Author=prbu, Component Class=Capacitors, Component Status=Active, ComponentLink1Description=Datasheet, ComponentLink1URL=https://www.murata.com/en-sg/products/productdetail?partno=GRM188C71C225KE11%23, ComponentLink2Description="Supplier link", ComponentLink2URL=https://www.mouser.com/ProductDetail/Murata-Electronics/GRM188C71C225KE11D?qs=ipkqEa07%2FjwigLKmkO4MzA%3D%3D, Footprint Doc=0603, HelpURL=N.A., LatestRevisionDate=2021-12-09, Note=16V, Pad Count=2, Part Number=C0603-2µ2-16V-X7S-GRM188C71C225KE11, Part number Norautron=N.A., PartId=100200490, Published=2021-12-09, Supplier 1=Mouser, Supplier 2=DigiKey, Supplier Part Number 2=490-12731-1-ND
C8: library part C0201-10n-16V-X7R-GRM033R71C103KE14, "Capacitor, Ceramic, 10nF 16V X7R 0201,±10%", Manufacturer=Murata, Manufacturer Part Number=GRM033R71C103KE14D, Part number IPS=N.A., Part number NEMS=100200491, Supplier Part Number 1=490-14453-1-ND, Artikkelnr Noca=N.A., Author=prbu, Component Class=Capacitors, Component Status=Active, ComponentLink1Description=Datasheet, ComponentLink1URL=https://www.murata.com/en-sg/products/productdetail?partno=GRM033R71C103KE14%23, ComponentLink2Description="Supplier link", ComponentLink2URL=https://www.mouser.com/ProductDetail/Murata-Electronics/GRM033R71C103KE14D?qs=QzBtWTOodeUmwPFZnw4Ogg%3D%3D, Footprint Doc=0201, HelpURL=N.A., LatestRevisionDate=2021-12-09, Note=16V, Pad Count=2, Part Number=C0201-10n-16V-X7R-GRM033R71C103KE14, Part number Norautron=N.A., PartId=100200491, Published=2021-12-09, Supplier 1=DigiKey, Supplier 2=Mouser, Supplier Part Number 2=81-GRM033R71C103KE4D
C9: library part C0402-2µ2-25V-X5R-GRM155R61E225KE11, "Capacitor, Ceramic, 2.2µF 25V X5R 0402,±10%", Manufacturer=Murata, Manufacturer Part Number=GRM155R61E225KE11D, Part number IPS=N.A., Part number NEMS=100200492, Supplier Part Number 1=81-GRM155R61E225KE1D, Artikkelnr Noca=N.A., Author=prbu, Component Class=Capacitors, Component Status=Active, ComponentLink1Description=Datasheet, ComponentLink1URL=https://www.murata.com/en-sg/products/productdetail?partno=GRM155R61E225KE11%23, ComponentLink2Description="Supplier link", ComponentLink2URL=https://www.mouser.com/ProductDetail/Murata-Electronics/GRM155R61E225KE11D?qs=eeBpzGFlv%252B8X58bIUndZvA%3D%3D, Footprint Doc=0402, HelpURL=N.A., LatestRevisionDate=2021-12-09, Note=25V, Pad Count=2, Part Number=C0402-2µ2-25V-X5R-GRM155R61E225KE11, Part number Norautron=N.A., PartId=100200492, Published=2021-12-09, Supplier 1=Mouser, Supplier 2=DigiKey, Supplier Part Number 2=490-12703-1-ND
C10: library part C0402-1µ0-16V-X6S-GRM155C81C105KE11D, "Capacitor, Ceramic, 1.0µF 16V X6S 0402,±10%", Manufacturer=Murata, Manufacturer Part Number=GRM155C81C105KE11D, Part number IPS=N.A., Part number NEMS=100200516, Supplier Part Number 1=490-12700-2-ND, Artikkelnr Noca=N.A., Author=prbu, Component Class=Capacitors, Component Status=Active, ComponentLink1Description=Datasheet, ComponentLink1URL=https://www.murata.com/en-sg/products/productdetail?partno=GRM155C81C105KE11%23, ComponentLink2Description="Supplier link", ComponentLink2URL=https://www.digikey.com/en/products/detail/murata-electronics/GRM155C81C105KE11D/4905091, Footprint Doc=0402, HelpURL=N.A., LatestRevisionDate=2023-01-03, Note=16V, Pad Count=2, Part Number=C0402-1µ0-16V-X6S-GRM155C81C105KE11D, Part number Norautron=N.A., PartId=100200516, Published=2022-07-01, Supplier 1=DigiKey, Supplier 2=Mouser, Supplier Part Number 2=81-GRM155C81C105KE1D
C12 C17: library part C0201-100n-16V-X7S-GRM033C71C104KE14, "Capacitor, Ceramic, 100nF 16V X7S 0201,±10%", Manufacturer=Murata, Manufacturer Part Number=GRM033C71C104KE14D, Part number IPS=N.A., Part number NEMS=100200494, Supplier Part Number 1=81-GRM33C71C104KE14D, Artikkelnr Noca=N.A., Author=prbu, Component Class=Capacitors, Component Status=Active, ComponentLink1Description=Datasheet, ComponentLink1URL=https://www.murata.com/en-sg/products/productdetail?partno=GRM033C71C104KE14%23, ComponentLink2Description="Supplier link", ComponentLink2URL=https://www.mouser.com/ProductDetail/Murata-Electronics/GRM033C71C104KE14D?qs=P%2FC4Eoq9CDzkjc0H6wJP9A%3D%3D, Footprint Doc=0201, HelpURL=N.A., LatestRevisionDate=2021-12-09, Note=16V, Pad Count=2, Part Number=C0201-100n-16V-X7S-GRM033C71C104KE14, Part number Norautron=N.A., PartId=100200494, Published=2021-12-09, Supplier 1=Mouser, Supplier 2=DigiKey, Supplier Part Number 2=490-10387-1-ND
C13: library part C0201-22n-10V-X5R-GRM033R61A223KE84, "Capacitor, Ceramic, 22nF 10V X5R 0201,±10%", Manufacturer=Murata, Manufacturer Part Number=GRM033R61A223KE84D, Part number IPS=N.A., Part number NEMS=100200495, Supplier Part Number 1=81-GRM033R61A223KE4E, Artikkelnr Noca=N.A., Author=prbu, Component Class=Capacitors, Component Status=Active, ComponentLink1Description=Datasheet, ComponentLink1URL=https://www.murata.com/en-sg/products/productdetail?partno=GRM033R61A223KE84%23, ComponentLink2Description="Supplier link", ComponentLink2URL=https://www.mouser.com/ProductDetail/Murata-Electronics/GRM033R61A223KE84E?qs=BZBei1rCqCCPqziwOnRusw%3D%3D, Footprint Doc=0201, HelpURL=N.A., LatestRevisionDate=2021-12-09, Note=10V, Pad Count=2, Part Number=C0201-22n-10V-X5R-GRM033R61A223KE84, Part number Norautron=N.A., PartId=100200495, Published=2021-12-09, Supplier 1=Mouser, Supplier 2=DigiKey, Supplier Part Number 2=490-13334-1-ND
C15: library part C0201-2µ2-10V-X5R-GRM033R61A225KE47, "Capacitor, Ceramic, 2.2µF 10V X5R 0201,±10%", Manufacturer=Murata, Manufacturer Part Number=GRM033R61A225KE47D, Part number IPS=N.A., Part number NEMS=100200496, Supplier Part Number 1=81-GRM033R61A225KE7D, Artikkelnr Noca=N.A., Author=prbu, Component Class=Capacitors, Component Status=Active, ComponentLink1Description=Datasheet, ComponentLink1URL=https://www.murata.com/en-sg/products/productdetail?partno=GRM033R61A225KE47%23, ComponentLink2Description="Supplier link", ComponentLink2URL=https://www.mouser.com/ProductDetail/Murata-Electronics/GRM033R61A225KE47D?qs=I53XXhTNm8tqgHaFsI1bug%3D%3D, Footprint Doc=0201, HelpURL=N.A., LatestRevisionDate=2021-12-09, Note=10V, Pad Count=2, Part Number=C0201-2µ2-10V-X5R-GRM033R61A225KE47, Part number Norautron=N.A., PartId=100200496, Published=2021-12-09, Supplier 1=Mouser, Supplier 2=DigiKey, Supplier Part Number 2=490-13227-1-ND
C16: library part C0402-1µ0-10V-X7S-GRM155C71A105KE11, "Capacitor, Ceramic, 1.0µF 10V X7S 0402,±10%", Manufacturer=Murata, Manufacturer Part Number=GRM155C71A105KE11D, Part number IPS=N.A., Part number NEMS=100200497, Supplier Part Number 1=81-GRM155C71A105KE1J, Artikkelnr Noca=N.A., Author=prbu, Component Class=Capacitors, Component Status=Active, ComponentLink1Description=Datasheet, ComponentLink1URL=https://www.murata.com/en-sg/products/productdetail?partno=GRM155C71A105KE11%23, ComponentLink2Description="Supplier link", ComponentLink2URL=https://www.digikey.com/en/products/detail/murata-electronics/GRM155C71A105KE11D/6606086, Footprint Doc=0402, HelpURL=N.A., LatestRevisionDate=2021-12-09, Note=10V, Pad Count=2, Part Number=C0402-1µ0-10V-X7S-GRM155C71A105KE11, Part number Norautron=N.A., PartId=100200497, Published=2021-12-09, Supplier 1=Mouser, Supplier 2=DigiKey, Supplier Part Number 2=490-14457-1-ND
C19: library part C0201-82p, "Chip Cap 0201", Manufacturer=N.A., Part number NEMS=100200043, Artikkelnr Noca=N.A., Author=rsk, Component Class=Capacitors, Component Status=Active, ComponentLink1Description=Datasheet, ComponentLink1URL=N.A., ComponentLink2Description="Supplier link", ComponentLink2URL=N.A., Footprint Doc=0201, HelpURL=N.A., LatestRevisionDate=2014-11-13, Manufacturer Part Number=N.A., Note="Chip Cap 1%", Pad Count=2, Part Number=C0201-82p, Part number IPS=N.A., Part number Norautron=N.A., PartId=100200043, Published=2014-11-13, Supplier 1=N.A., Supplier 2=N.A., Supplier Part Number 1=N.A., Supplier Part Number 2=N.A.
C20 C21: library part C0603-4.7µ-10V-X7R, "Capacitor, MLCC", Manufacturer=Murata, Manufacturer Part Number=GRM188Z71A475KE15J, Part number IPS=N.A., Part number NEMS=100200438, Supplier Part Number 1=81-GRM188Z71A475KE5J, Artikkelnr Noca=N.A., Author=rsk, Component Class=Capacitors, Component Status=Active, ComponentLink1Description=Datasheet, ComponentLink1URL=https://search.murata.co.jp/Ceramy/image/img/A01X/G101/ENG/GRM188Z71A475KE15-01A.pdf, ComponentLink2Description="Supplier link", ComponentLink2URL=https://psearch.en.murata.com/capacitor/product/GRM188Z71A475KE15%23.html, Footprint Doc=0603, HelpURL=https://no.mouser.com/ProductDetail/Murata-Electronics/GRM188Z71A475KE15J?qs=%2Fha2pyFaduhv%2F%252BvqdTaCX6sbHo9W1tclfmo%252Bk8bHlE54zWsbeQAlbA%3D%3D, LatestRevisionDate=2020-10-13, Note=10V, Pad Count=2, Part Number=C0603-4.7µ-10V-X7R, Part number Norautron=N.A., PartId=100200438, Published=2020-01-21, Supplier 1=Mouser, Supplier 2=N.A., Supplier Part Number 2=N.A.
C24: library part C0402-0.7p-50V-C0G-GJM1555C1HR70WB01, "Capacitor, C0G/NP0, 50V, ±0.05pF, 0402", Manufacturer=Murata, Manufacturer Part Number=GJM1555C1HR70WB01D, Part number IPS=N.A., Part number NEMS=100200707, Supplier Part Number 1=490-11252-1-ND, Artikkelnr Noca=N.A., Author=hany, Component Class=Capacitors, Component Status=Active, ComponentLink1Description=Datasheet, ComponentLink1URL=https://search.murata.co.jp/Ceramy/image/img/A01X/G101/ENG/GJM1555C1HR70WB01-01.pdf, ComponentLink2Description="Supplier link", ComponentLink2URL=https://www.digikey.no/en/products/detail/murata-electronics/GJM1555C1HR70WB01D/2330145, Footprint Doc=0402, HelpURL=https://pim.murata.com/en-global/pim/details/?productCategoryId=ceramicCapacitorSMD&partNum=GJM1555C1HR70WB01%23, LatestRevisionDate=2025-09-22, Note=50V, Pad Count=2, Part Number=C0402-0.7p-50V-C0G-GJM1555C1HR70WB01, Part number Norautron=N.A., PartId=100200707, Published=2025-09-22, Supplier 1=DigiKey, Supplier 2=N.A., Supplier Part Number 2=N.A.
F1: library part LFD182G45DCJD247, "Signal Conditioning 2.4GHz and 5GHz Diplexer", Manufacturer=Murata, Part number IPS=N.A., Part number NEMS=100800026, Supplier Part Number 1=81-LFD182G45DCJD247, Artikkelnr Noca=N.A., Author=hany, Component Class=Filters, Component Status=Active, ComponentLink1Description=Datasheet, ComponentLink1URL=https://no.mouser.com/datasheet/2/281/1/LFD182G45DCJD247-2399435.pdf, ComponentLink2Description="Supplier link", ComponentLink2URL=N.A., Footprint Doc=CAF, HelpURL=N.A., LatestRevisionDate=2021-10-06, Manufacturer Part Number=LFD182G45DCJD247, Note=N.A., Pad Count=6, Part Number=LFD182G45DCJD247, Part number Norautron=N.A., PartId=100800026, Published=2021-10-06, Supplier 1=Mouser, Supplier 2=N.A., Supplier Part Number 2=N.A.
Fid1 Fid2: library part Fid-Mark, "Fiducial Mark", Manufacturer=N.A., Part number NEMS=100500073, Artikkelnr Noca=N.A., Author=rsk, Component Class=Connectors, Component Status=Active, ComponentLink1Description=Datasheet, ComponentLink1URL=N.A., ComponentLink2Description="Supplier link", ComponentLink2URL=N.A., Footprint Doc=Fiducial, HelpURL=N.A., LatestRevisionDate=2009-12-12, Manufacturer Part Number=N.A., Note=N.A., Pad Count=1, Part Number=Fid-Mark, Part number IPS=N.A., Part number Norautron=N.A., PartId=100500073, Published=2009-12-12, Supplier 1=N.A., Supplier 2=N.A., Supplier Part Number 1=N.A., Supplier Part Number 2=N.A., System=Connector
L1: library part L1008-3µ3-LQM2HPN3R3MGCL, "Inductor, 1A, ±20%, 200mOhm", Manufacturer=Murata, Manufacturer Part Number=LQM2HPN3R3MGCL, Part number IPS=N.A., Part number NEMS=100300406, Supplier Part Number 1=490-12070-1-ND, Artikkelnr Noca=N.A., Author=prbu, Component Class=Inductors, Component Status=Active, ComponentLink1Description=Datasheet, ComponentLink1URL=https://www.murata.com/en-sg/products/productdetail?partno=LQM2HPN3R3MGC%23, ComponentLink2Description="Supplier link", ComponentLink2URL=https://www.digikey.com/en/products/detail/murata-electronics/LQM2HPN3R3MGCL/4359129?s=N4IgTCBcDaIDIEUCyYASAFAcgZgEraQHEBhOEAXQF8g, Footprint Doc=1008, HelpURL=https://www.murata.com/en-sg/products/productdetail?partno=LQM2HPN3R3MGC%23, LatestRevisionDate=2022-01-20, Note="-55°C ~ 125°C", Pad Count=2, Part Number=L1008-3µ3-LQM2HPN3R3MGCL, Part number Norautron=N.A., PartId=100300406, Published=2022-01-20, Supplier 1=DigiKey, Supplier 2=N.A., Supplier Part Number 2=N.A.
L2: library part L0402-7n0-Wirewound-Murata, "Inductor, 570mA, ±2%, 130mΩ", Manufacturer=Murata, Manufacturer Part Number=LQW15AN7N0G00, Part number IPS=N.A., Part number NEMS=100300337, Artikkelnr Noca=N.A., Author=rsk, Component Class=Inductors, Component Status=Active, ComponentLink1Description=Datasheet, ComponentLink1URL=https://search.murata.co.jp/Ceramy/image/img/P02/JELF243A-0050.pdf, ComponentLink2Description="Supplier link", ComponentLink2URL=N.A., Footprint Doc=0402, HelpURL=https://psearch.en.murata.com/inductor/product/LQW15AN7N0G00%23.html, LatestRevisionDate=2019-04-16, Note="-55°C ~ 125°C", Pad Count=2, Part Number=L0402-7n0-Wirewound-Murata, Part number Norautron=N.A., PartId=100300337, Published=2019-04-16, Supplier 1=N.A., Supplier 2=N.A., Supplier Part Number 1=N.A., Supplier Part Number 2=N.A.
L4: library part L0402-2n4-Wirewound-LQW15AN_80, "Inductor, 2.53A, 2%, 22mΩ, Q=30", Manufacturer=Murata, Manufacturer Part Number=LQW15AN2N4G80, Part number IPS=N.A., Part number NEMS=100300507, Supplier Part Number 1=81-LQW15AN2N4G80D, Artikkelnr Noca=N.A., Author=prbu, Component Class=Inductors, Component Status=Active, ComponentLink1Description=Datasheet, ComponentLink1URL=https://search.murata.co.jp/Ceramy/image/img/P02/JELF243A-0100.pdf, ComponentLink2Description="Supplier link", ComponentLink2URL=N.A., Footprint Doc=0402, HelpURL=https://www.murata.com/en-sg/products/productdetail?partno=LQW15AN2N4G80%23, LatestRevisionDate=2024-12-31, Note="-55°C ~ 125°C", Pad Count=2, Part Number=L0402-2n4-Wirewound-LQW15AN_80, Part number Norautron=N.A., PartId=100300507, Published=2024-12-31, Supplier 1=Mouser, Supplier 2=DigiKey, Supplier Part Number 2=490-LQW15AN2N4G80DCT-ND
LABEL1: library part Label_12x32, "PCA version label, stick-on, 12x32mm", Manufacturer="Ellco Etikett", Manufacturer Part Number=68616, Part number IPS=N.A., Part number NEMS=101200029, Artikkelnr Noca=N.A., Author=hany, Component Class=Mechanicals, Component Status=Active, ComponentLink1Description=Datasheet, ComponentLink1URL=N.A., ComponentLink2Description="Supplier link", ComponentLink2URL=N.A., Footprint Doc=Label, HelpURL=N.A., LatestRevisionDate=2023-01-05, Note=N.A., Pad Count=0, Part Number=Label_12x32, Part number Norautron=N.A., PartId=101200029, Published=2023-01-05, Supplier 1=N.A., Supplier 2=N.A., Supplier Part Number 1=N.A., Supplier Part Number 2=N.A.
LOGO2: library part "WEEE Symbol 3x4.5mm", "WEEE Directive symbol", Manufacturer=N.A., Part number NEMS=101100006, Artikkelnr Noca=N.A., Author=rsk, Component Class=Markings, Component Status=Active, ComponentLink1Description=Datasheet, ComponentLink1URL=N.A., ComponentLink2Description="Supplier link", ComponentLink2URL=N.A., Footprint Doc=WEEE_3x4.5mm, HelpURL=N.A., LatestRevisionDate=2023-03-07, Manufacturer Part Number=N.A., Note=N.A., Pad Count=0, Part Number="WEEE Symbol 3x4.5mm", Part number IPS=N.A., Part number Norautron=N.A., PartId=101100006, Published=2016-09-07, Supplier 1=N.A., Supplier 2=N.A., Supplier Part Number 1=N.A., Supplier Part Number 2=N.A.
P1: library part 2185-213ZG0CYNR3, "Socket 2x13, 2.54mm (100mil), Right Angle, SMD", Manufacturer=WCON, Part number IPS=N.A., Part number NEMS=100500914, Artikkelnr Noca=N.A., Author=hany, Component Class=Connectors, Component Status=Active, ComponentLink1Description=Datasheet, ComponentLink1URL=https://www.wcon.com/assets/upload/2023-09-16/C_2185-2XXZXXCYNT1.pdf, ComponentLink2Description="Supplier link", ComponentLink2URL=N.A., Footprint Doc=SOCKET_ANG_2x13_SMD-2.54mm, HelpURL=https://www.wcon.com/product/2185-2xxzxxcynx1.html, LatestRevisionDate=2025-08-11, Manufacturer Part Number=2185-213ZG0CYNR3, Note=N.A., Pad Count=26, Part Number=2185-213ZG0CYNR3, Part number Norautron=N.A., PartId=100500914, Published=2025-08-11, Supplier 1=N.A., Supplier 2=N.A., Supplier Part Number 1=N.A., Supplier Part Number 2=N.A., System=Connector
P2: library part 2185-202ZS0CYNR3, "Socket 2x2, 2.54mm (100mil), Right Angle, SMD", Manufacturer=WCON, Part number IPS=N.A., Part number NEMS=100500857, Artikkelnr Noca=N.A., Author=daba, Component Class=Connectors, Component Status=Active, ComponentLink1Description=Datasheet, ComponentLink1URL=https://www.wcon.com/assets/upload/2023-09-16/C_2185-2XXZXXCYNT1.pdf, ComponentLink2Description="Supplier link", ComponentLink2URL=N.A., Footprint Doc=WCON_2185-202ZSxCYNRX, HelpURL=https://www.wcon.com/product/2185-2xxzxxcynx1.html, LatestRevisionDate=2024-09-27, Manufacturer Part Number=2185-202ZS0CYNR3, Note=N.A., Pad Count=4, Part Number=2185-202ZS0CYNR3, Part number Norautron=N.A., PartId=100500857, Published=2024-05-30, Supplier 1=N.A., Supplier 2=WCON, Supplier Part Number 1=N.A., Supplier Part Number 2=2185-202ZS0CYNR3, System=Connector
P4 P10: "Pin List 1x3, 2.54mm (100mil)", Manufacturer=N.A., Part number NEMS=100500304, Artikkelnr Noca=56019041, Author=rsk, Component Class=Connectors, Component Status=Active, ComponentLink1Description=Datasheet, ComponentLink1URL=N.A., ComponentLink2Description="Supplier link", ComponentLink2URL=N.A., Footprint Doc=LIST_1x3, HelpURL=N.A., LatestRevisionDate=2009-12-12, Manufacturer Part Number=N.A., Note=N.A., Pad Count=3, Part Number="Pin List 1x3", Part number IPS=N.A., Part number Norautron=N.A., PartId=100500304, Published=2009-12-12, Supplier 1=N.A., Supplier 2=N.A., Supplier Part Number 1=N.A., Supplier Part Number 2=N.A., System=Connector
R1 R2 R3 R16: library part R0402-0R, "Resistor, ±5%, 0.063W", Manufacturer=N.A., Part number IPS=00000007128, Part number NEMS=100100109, Supplier Part Number 1=146-9661, Artikkelnr Noca=27049000, Author=rsk, Component Class=Resistors, Component Status=Active, ComponentLink1Description=Datasheet, ComponentLink1URL=N.A., ComponentLink2Description="Supplier link", ComponentLink2URL=N.A., Footprint Doc=0402, HelpURL=N.A., LatestRevisionDate=2009-11-23, Manufacturer Part Number=N.A., Note="Chip Res 5%", Pad Count=2, Part Number=R0402-0R, Part number Norautron=N.A., PartId=100100109, Published=2009-05-08, Supplier 1=Farnell, Supplier 2=N.A., Supplier Part Number 2=N.A.
R5: library part R0201-560k, "Resistor, ±1%, 0.05W", Manufacturer=N.A., Part number IPS=00000004799, Part number NEMS=100100090, Artikkelnr Noca=N.A., Author=rsk, Component Class=Resistors, Component Status=Active, ComponentLink1Description=Datasheet, ComponentLink1URL=N.A., ComponentLink2Description="Supplier link", ComponentLink2URL=N.A., Footprint Doc=0201, HelpURL=N.A., LatestRevisionDate=2014-11-13, Manufacturer Part Number=N.A., Note="Chip Res 1%", Pad Count=2, Part Number=R0201-560k, Part number Norautron=N.A., PartId=100100090, Published=2014-11-13, Supplier 1=N.A., Supplier 2=N.A., Supplier Part Number 1=N.A., Supplier Part Number 2=N.A.
R7: library part R0201-160k, "Resistor, ±1%, 0.05W", Manufacturer=N.A., Part number NEMS=100100657, Artikkelnr Noca=N.A., Author=hany, Component Class=Resistors, Component Status=Active, ComponentLink1Description=Datasheet, ComponentLink1URL=N.A., ComponentLink2Description="Supplier link", ComponentLink2URL=N.A., Footprint Doc=0201, HelpURL=N.A., LatestRevisionDate=2022-03-28, Manufacturer Part Number=N.A., Note="Chip Res 1%", Pad Count=2, Part Number=R0201-160k, Part number IPS=N.A., Part number Norautron=N.A., PartId=100100657, Published=2022-03-28, Supplier 1=N.A., Supplier 2=N.A., Supplier Part Number 1=N.A., Supplier Part Number 2=N.A.
R10 R11 R12 R13 R14 R15: library part R0201-100k, "Resistor, ±1%, 0.05W", Manufacturer=N.A., Part number IPS=00000001419, Part number NEMS=100100080, Part number Norautron=26108487, Artikkelnr Noca=N.A., Author=rsk, Component Class=Resistors, Component Status=Active, ComponentLink1Description=Datasheet, ComponentLink1URL=N.A., ComponentLink2Description="Supplier link", ComponentLink2URL=N.A., Footprint Doc=0201, HelpURL=N.A., LatestRevisionDate=2014-11-13, Manufacturer Part Number=N.A., Note="Chip Res 1%", Pad Count=2, Part Number=R0201-100k, PartId=100100080, Published=2014-11-13, Supplier 1=N.A., Supplier 2=N.A., Supplier Part Number 1=N.A., Supplier Part Number 2=N.A.
SB1 SB2 SB3 SB4: library part "Solderbridge Shorted 0.4mm", "Shorted Solderbridge", Manufacturer=N.A., Part number NEMS=100500561, Artikkelnr Noca=N.A., Author=rsk, Component Class=Connectors, Component Status=Active, ComponentLink1Description=Datasheet, ComponentLink1URL=N.A., ComponentLink2Description="Supplier link", ComponentLink2URL=N.A., Footprint Doc=Solderbridge_Shorted, HelpURL=N.A., LatestRevisionDate=2012-08-07, Manufacturer Part Number=N.A., Note=N.A., Pad Count=2, Part Number="Solderbridge Shorted 0.4mm", Part number IPS=N.A., Part number Norautron=N.A., PartId=100500561, Published=2012-08-07, Supplier 1=N.A., Supplier 2=N.A., Supplier Part Number 1=N.A., Supplier Part Number 2=N.A., System=Connector
SB5 SB6 SB7 SB8: library part "Solderbridge 0.4mm", Manufacturer=N.A., Part number NEMS=100500560, Artikkelnr Noca=N.A., Author=rsk, Component Class=Connectors, Component Status=Active, ComponentLink1Description=Datasheet, ComponentLink1URL=N.A., ComponentLink2Description="Supplier link", ComponentLink2URL=N.A., Footprint Doc=Solderbridge, HelpURL=N.A., LatestRevisionDate=2009-12-14, Manufacturer Part Number=N.A., Note=N.A., Pad Count=2, Part Number="Solderbridge 0.4mm", Part number IPS=N.A., Part number Norautron=N.A., PartId=100500560, Published=2009-12-14, Supplier 1=N.A., Supplier 2=N.A., Supplier Part Number 1=N.A., Supplier Part Number 2=N.A., System=Connector
SB9 SB10: library part "Solderbridge Shorted Power", "Shorted Solderbridge Power", Manufacturer=N.A., Part number NEMS=100500460, Artikkelnr Noca=N.A., Author=rsk, Component Class=Connectors, Component Status=Active, ComponentLink1Description=Datasheet, ComponentLink1URL=N.A., ComponentLink2Description="Supplier link", ComponentLink2URL=N.A., Footprint Doc=Solderbridge_Shorted_Power, HelpURL=N.A., LatestRevisionDate=2012-08-07, Manufacturer Part Number=N.A., Note=N.A., Pad Count=2, Part Number="Solderbridge Shorted Power", Part number IPS=N.A., Part number Norautron=N.A., PartId=100500460, Published=2012-08-07, Supplier 1=N.A., Supplier 2=N.A., Supplier Part Number 1=N.A., Supplier Part Number 2=N.A., System=Connector
U1: library part nRF7002-QFAAB0, "Wi-fi Dual Band Companion chip", Manufacturer="Nordic Semiconductor", Part number IPS=N.A., Part number NEMS=102000276, Artikkelnr Noca=N.A., Author=hany, Component Class=Nordic_Devices, Component Status=Active, ComponentLink1Description=Datasheet, ComponentLink1URL=N.A., ComponentLink2Description="Supplier link", ComponentLink2URL=N.A., Footprint Doc=QFN-48, HelpURL=N.A., LatestRevisionDate=2023-01-11, Manufacturer Part Number=nRF7002-QFAAB0, Note=N.A., Pad Count=49, Part Number=nRF7002-QFAAB0, Part number Norautron=N.A., PartId=102000276, Published=2023-01-11, Supplier 1="Nordic Semiconductor", Supplier 2=N.A., Supplier Part Number 1=nRF7002-QFAAB0, Supplier Part Number 2=N.A.
U5: library part AP2127K-ADJTRG1, "IC REG LDO ADJ 0.3A SOT23-5", Manufacturer="Diodes Incorporated", Part number IPS=N.A., Part number NEMS=101900493, Supplier Part Number 1=AP2127K-ADJTRG1DITR-ND, Artikkelnr Noca=N.A., Author=rsk, Component Class=Misc_ICs, Component Status=Active, ComponentLink1Description=Datasheet, ComponentLink1URL=N.A., ComponentLink2Description="Supplier link", ComponentLink2URL=N.A., Footprint Doc=SOT23-5, HelpURL=https://www.diodes.com/assets/Datasheets/AP2127.pdf, LatestRevisionDate=2017-07-20, Manufacturer Part Number=AP2127K-ADJTRG1, Note=N.A., Pad Count=5, Part Number=AP2127K-ADJTRG1, Part number Norautron=N.A., PartId=101900493, Published=2017-07-20, Supplier 1=DigiKey, Supplier 2=N.A., Supplier Part Number 2=N.A.
U6: "1.0 A Load Switch IC with Slew Rate Control Driver in Ultra Small Package", Manufacturer=Toshiba, Manufacturer Part Number=TCK106AG,LF, Part number IPS=00000004390, Part number NEMS=101900575, Part number Norautron=26500627, Supplier Part Number 1=TCK106AGLFTR-ND, Artikkelnr Noca=N.A., Author=rsk, Component Class=Misc_ICs, Component Status=Active, ComponentLink1Description=Datasheet, ComponentLink1URL=https://toshiba.semicon-storage.com/info/docget.jsp?did=30131&prodName=TCK106AG, ComponentLink2Description="Supplier link", ComponentLink2URL=N.A., Footprint Doc=WLCSP-4, HelpURL=N.A., LatestRevisionDate=2019-03-01, Note=N.A., Pad Count=4, Part Number=TCK106AG, PartId=101900575, Published=2019-02-17, Supplier 1=DigiKey, Supplier 2=Mouser, Supplier Part Number 2=757-TCK106AGLF
X1: library part XTAL_SMD1612_40MHz_8pF_Kyocera, "XTAL SMD 1612, 40MHz, Cl=8pF, Total Tol: ±10ppm, -30 - 85C", Manufacturer=Kyocera, Manufacturer Part Number=CX1612DB40000D0WLLCC, Part number IPS=N.A., Part number NEMS=101600104, Artikkelnr Noca=N.A., Author=hany, Component Class=Oscillators, Component Status=Active, ComponentLink1Description=Datasheet, ComponentLink1URL=N.A., ComponentLink2Description="Supplier link", ComponentLink2URL=N.A., Footprint Doc=XTAL_1612, HelpURL=N.A., LatestRevisionDate=2023-02-03, Note="XTAL SMD 40.000MHz 8pF", Pad Count=4, Part Number=XTAL_SMD1612_40MHz_8pF_Kyocera, Part number Norautron=N.A., PartId=101600104, Published=2023-02-03, Supplier 1=N.A., Supplier 2=N.A., Supplier Part Number 1=N.A., Supplier Part Number 2=N.A.

## Via types
v1: diameter 0.5, hole 0.25, Top Layer to Bottom Layer, tented both sides, 439 vias
v2: diameter 0.3, hole 0.1, Top Layer to Mid-Layer 1, tented both sides, 70 vias

## Nets (pads, with @x,y where several pads share a name; then routed paths per layer and width w, separated by ;. In a path a pad name is that pad's centre, name@x,y a point inside that pad or via, vN(x,y) a via of type N, cw(c..) or ccw(c..) an arc to the next point about the centre after c; other vN are vias at no path point)
ANT: C24.2 F1.6 | length 10
  Top Layer w1: 22.26,37.365 cw(c24.633,37.365) 24.633,39.738 C24.2@30.944,39.738
ANTWIFI: A1.4 R2.1
BUCKEN: P1.7 R10.1 U1.30 | length 17.5
  Top Layer w0.114: U1.30@22.66,27.095 22.66,26.518 23.094,26.084 23.094,25.792 23.16,25.726 23.16,25.527 23.411,25.276 23.411,25.108 v2(23.594,24.925)
  Top Layer w0.152: R10.1@26.571,21.694 v2@26.571,22.227
  Top Layer w0.2: P1.7@19.685,15.545 19.685,15.955 20.295,16.565 20.315,16.565 22.575,18.825 24.225,18.825 26.571,21.171 R10.1@26.571,21.694
  Mid-Layer 1 w0.2: v2(23.594,24.925) 24.369,24.925 25.394,23.9 25.394,23.383 v2(26.569,22.208)
CS: SB3.1 SB8.1 U1.36 | length 19.1
  Top Layer w0.152: U1.36@25.06,27.095 26.855,27.095 27.842,26.108 29.243,26.108 v2(33.275,26.108)
  Top Layer w0.254: SB8.1@38.735,18.727 38.735,19.02 v2(38.735,19.206) SB3.1@38.735,19.685
  Mid-Layer 1 w0.152: v2(33.275,26.108) 37.963,21.42 37.963,19.442 38.2,19.206 v2(38.735,19.206)